# EAGLE board Mother Board (EAGLE 9.6.2)
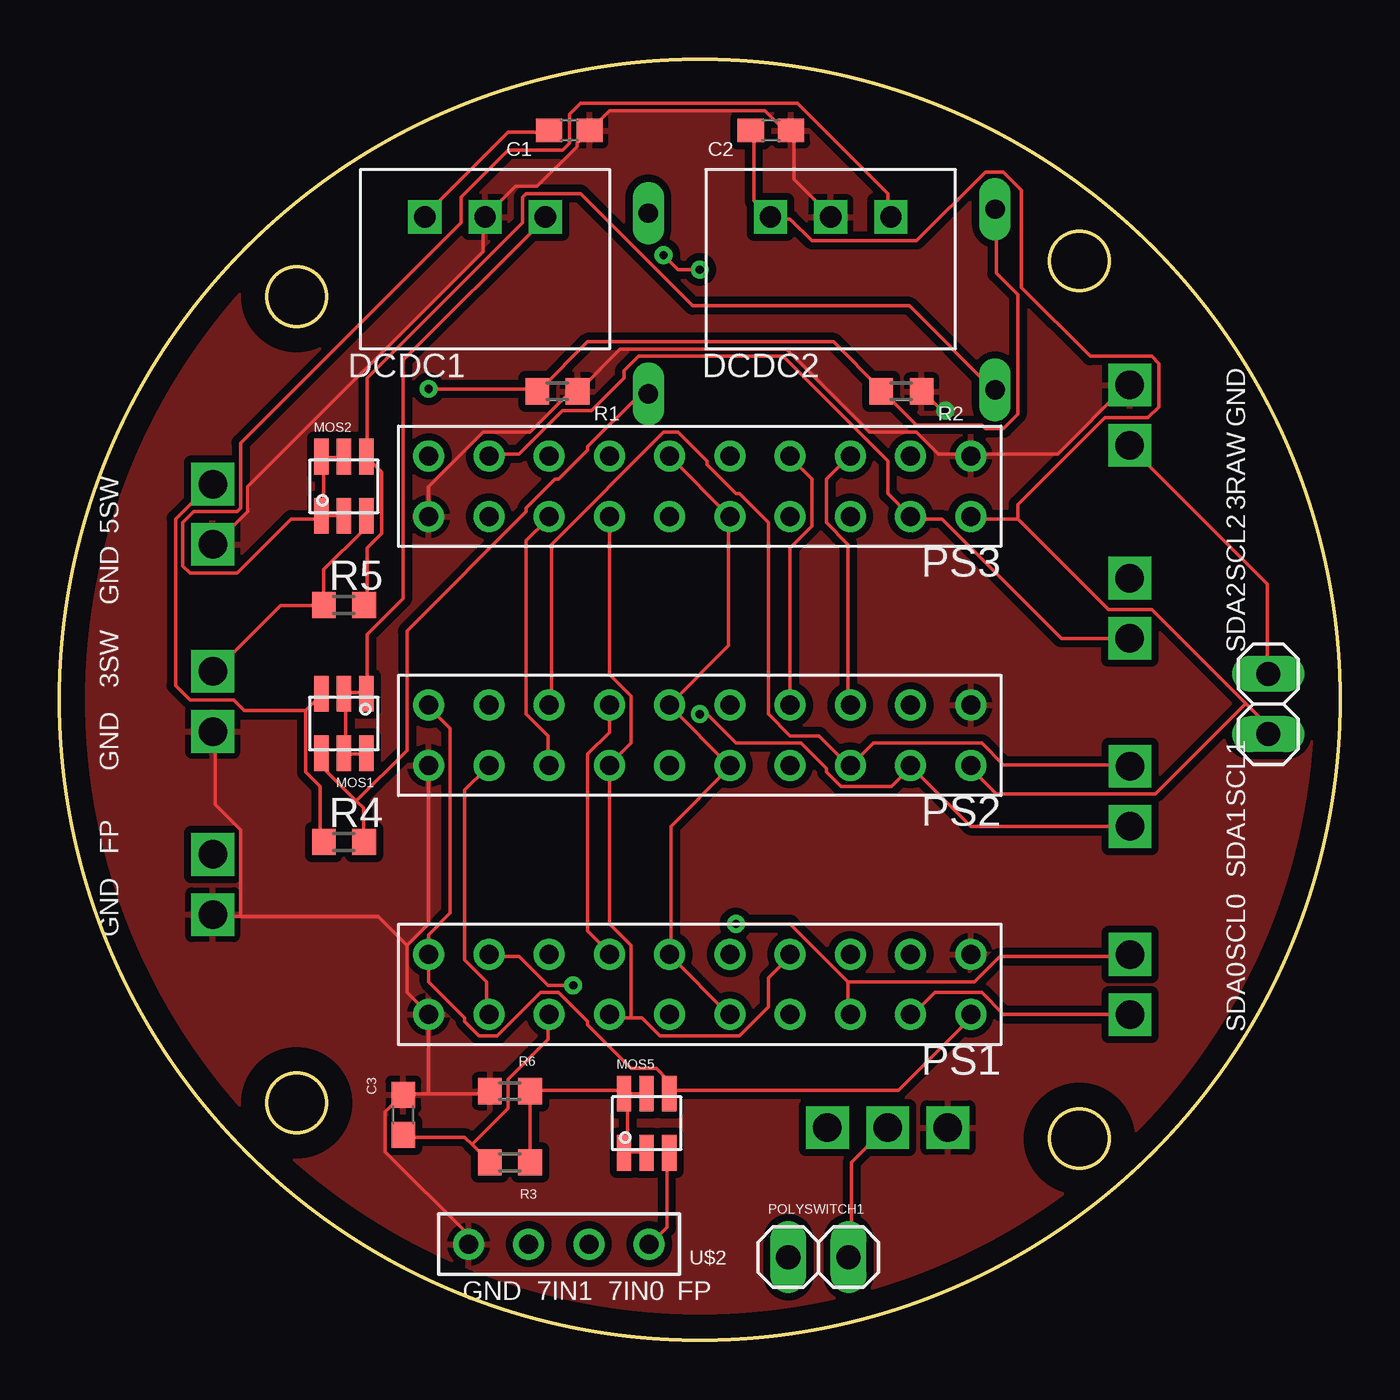
[diagram p0: board, top side]
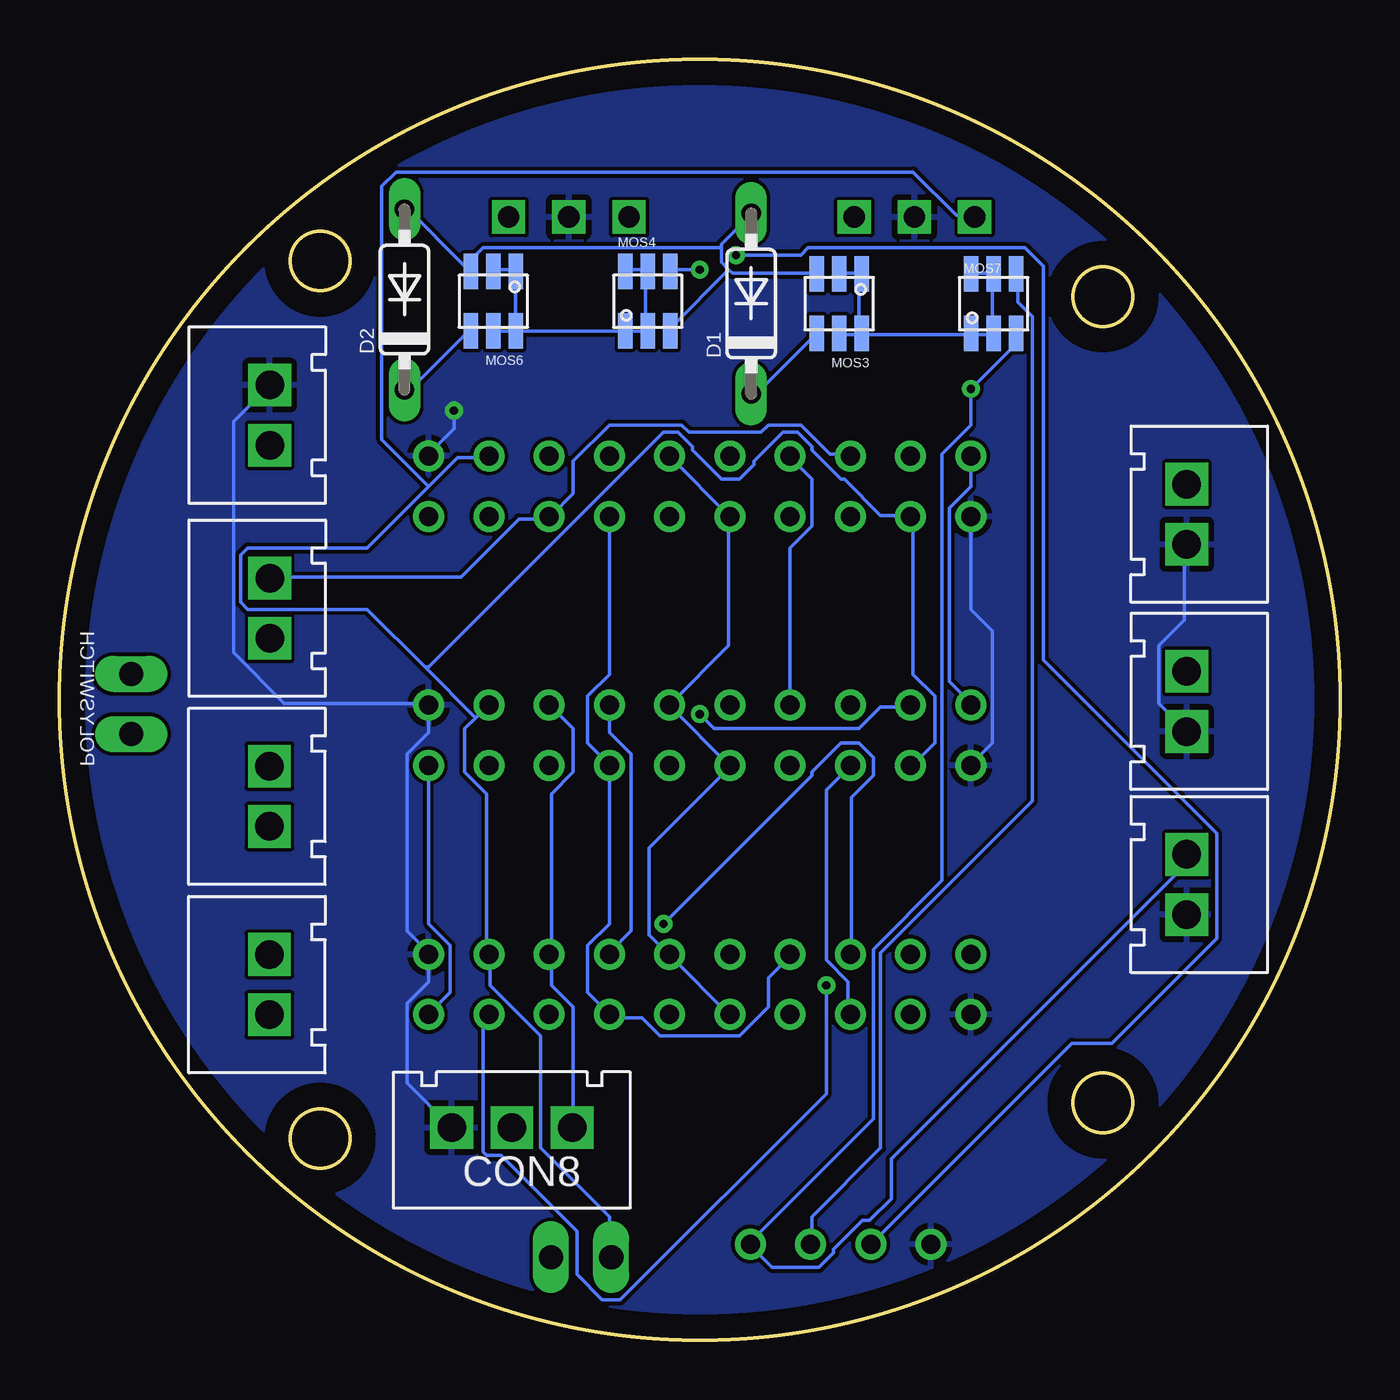
[diagram p1: board, bottom side, seen from below]

Size 54 x 54 mm. Coordinates in mm from the lower left corner, seen from the top.
Outline: circle at 27,27 radius 27
Outline: circle at 10,44 radius 1.25
Outline: circle at 10,10 radius 1.25
Outline: circle at 43,45.5 radius 1.25
Outline: circle at 43,8.5 radius 1.25
Copper layers (1*16): Top 0.035mm / dielectric 1.5mm / Bottom 0.035mm
Design rules "default": minimum track width 6mil, minimum drill 0.35mm, track to track 6mil, track to pad 6mil, pad to pad 6mil, via to via 6mil, smd to smd 6mil, copper to edge 40mil, drill to drill 6mil, minimum pad ring 10mil, minimum via ring 8mil, stop-mask expansion 4mil, vias tented up to drill 0mil, thermal gap 10mil
Net classes: 1 esp: width 0.254 mm, drill 0.127 mm, clearance 0.025 mm

## Footprints (pad centres in the part's own frame; a part is rotated, then mirrored left to right if it is on the bottom)
C0603 = smd 1.1 x 1: 1 -0.85,0; 2 0.85,0
2PIN = drill 1.2 square: P$1 -1.27,0; P$2 1.27,0
3PIN = drill 1.2 square: P$1 2.54,-2.54; P$2 5.08,-2.54; P$3 7.62,-2.54
DO35-7 = drill 0.813 long: A 3.81,0; C -3.81,0
5V1A_M78AR05-1 = drill 0.9 pad 1.27 square: GND 0,0; VIN 2.54,0; VOUT -2.54,0
3.3V1A_M78AR033-1 = drill 0.9 pad 1.27 square: GND 0,0; VIN 2.54,0; VOUT -2.54,0
SSM6J808R = smd 0.6 x 1.5: 1 -0.95,-1.25; 2 0,-1.25; 3 0.95,-1.25; 4 0.95,1.25; 5 0,1.25; 6 -0.95,1.25
1X02 = drill 1.016 long: 1 -1.27,0; 2 1.27,0
2X10 = drill 0.8: P$1 0,1.27; P$2 0,-1.27; P$3 -2.54,1.27; P$4 -2.54,-1.27; P$5 -5.08,1.27; P$6 -5.08,-1.27; P$7 -7.62,1.27; P$8 -7.62,-1.27; P$9 -10.16,1.27; P$10 -10.16,-1.27; P$11 -12.7,1.27; P$12 -12.7,-1.27; P$13 -15.24,1.27; P$14 -15.24,-1.27; P$15 -17.78,1.27; P$16 -17.78,-1.27; P$17 -20.32,1.27; P$18 -20.32,-1.27; P$19 -22.86,1.27; P$20 -22.86,-1.27
R0603 = smd 1 x 1.1: 1 -0.85,0; 2 0.85,0
1X4 = drill 0.8: P$1 0,0; P$2 2.54,0; P$3 5.08,0; P$4 7.62,0

## Placement (x,y rotation side)
C1  3.3uF  [C0603]  21.5,51 0 top
C2  3.3uF  [C0603]  30,51 0 top
C3  10uF  [C0603]  14.5,9.5 90 top
CON1  [2PIN]  45.14,14.99 270 bottom
CON2  [2PIN]  45.14,22.93 270 bottom
CON3  [2PIN]  45.13,30.86 270 bottom
CON4  [2PIN]  45.13,39 270 bottom
CON5  [2PIN]  6.47,19.21 90 bottom
CON6  [2PIN]  6.47,34.82 90 bottom
CON7  [2PIN]  6.47,26.93 90 bottom
CON8  [3PIN]  40,11.5 0 bottom
D1  1N4148DO35-7  [DO35-7]  24.83,43.7 90 bottom
D2  1N4148DO35-7  [DO35-7]  39.45,43.87 90 bottom
DCDC1  [5V1A_M78AR05-1]  17.95,47.35 0 top
DCDC2  [3.3V1A_M78AR033-1]  32.52,47.35 0 top
MOS1  [SSM6J808R]  12,26 180 top
MOS2  [SSM6J808R]  12,36 0 top
MOS3  [SSM6J808R]  21.12,43.7 180 bottom
MOS4  [SSM6J808R]  29.19,43.8 0 bottom
MOS5  [SSM6J808R]  24.76,9.15 0 top
MOS6  [SSM6J808R]  35.7,43.8 180 bottom
MOS7  [SSM6J808R]  14.61,43.7 0 bottom
POLYSWITCH  [1X02]  50.97,26.82 90 top
POLYSWITCH1  [1X02]  32,3.5 0 top
PS1  [2X10]  15.57,15 180 top
PS2  [2X10]  15.57,25.5 180 top
PS3  [2X10]  15.57,36 180 top
R1  1k  [R0603]  21,40 180 top
R2  1k  [R0603]  35.5,40 180 top
R3  1k  [R0603]  19,7.5 180 top
R4  100k  [R0603]  12,21 0 top
R5  100k  [R0603]  12,31 0 top
R6  10k  [R0603]  19,10.5 0 top
U$2  1X4  [1X4]  24.87,4.05 180 top

## Library data of the parts
C1-C3 = rcl; SPICEPREFIX: C
CON1-CON8 = XR Connector
D1 D2 = diode
DCDC1 DCDC2 = DC-DC
MOS1-MOS7 = Chip MOSFET
POLYSWITCH POLYSWITCH1 = pinhead
PS1-PS3 U$2 = PinSocket
R1-R6 = rcl; SPICEPREFIX: R

## Nets
3.3_RAW: CON4.P$2 POLYSWITCH.2
3.3VSW: CON7.P$2 MOS2.3 R5.1
5V_RAW: CON8.P$2 POLYSWITCH1.2
5VSW: CON6.P$2 MOS1.3 R4.1
7.4_0ENT: MOS7.4 U$2.P$2
7.4_1ENT: MOS4.4 U$2.P$3
+3V3: C2.1 DCDC2.VOUT MOS5.4 POLYSWITCH.1 PS1.P$2 PS1.P$19 PS2.P$2 PS2.P$19 PS3.P$2 PS3.P$19
+5V: C1.1 DCDC1.VOUT POLYSWITCH1.1 PS1.P$3 PS1.P$18 PS2.P$3 PS2.P$18 PS3.P$3 PS3.P$18
+5V1: DCDC1.VIN MOS1.1 MOS1.2 MOS1.5 MOS1.6
BIT1: PS1.P$9 PS1.P$12 PS2.P$9 PS2.P$12 PS3.P$9 PS3.P$12
BIT2: PS1.P$7 PS1.P$14 PS2.P$7 PS2.P$14 PS3.P$7 PS3.P$14
FP: CON5.P$2 D1.A D2.A MOS3.3 MOS4.3 MOS5.3 MOS6.3 MOS7.3 R1.2 R2.2 U$2.P$1
FP_CHECKER: C3.1 PS1.P$5 PS2.P$5 PS3.P$5 R3.2
GND: C1.2 C2.2 C3.2 CON4.P$1 CON5.P$1 CON6.P$1 CON7.P$1 CON8.P$1 DCDC1.GND DCDC2.GND PS1.P$1 PS1.P$20 PS2.P$1 PS2.P$20 PS3.P$1 PS3.P$20 R1.1 R2.1 R6.1 U$2.P$4
LOGRX: PS1.P$8 PS1.P$13 PS2.P$8 PS2.P$13 PS3.P$8 PS3.P$13
LOGTX: PS1.P$10 PS1.P$11 PS2.P$10 PS2.P$11 PS3.P$10 PS3.P$11
N$1: D2.C MOS2.4 MOS6.4 R5.2
N$2: MOS4.1 MOS4.2 MOS4.5 MOS4.6 MOS6.1 MOS6.2 MOS6.5 MOS6.6
N$5: DCDC2.VIN MOS2.1 MOS2.2 MOS2.5 MOS2.6
N$11: D1.C MOS1.4 MOS3.4 R4.2
N$12: MOS3.1 MOS3.2 MOS3.5 MOS3.6 MOS7.1 MOS7.2 MOS7.5 MOS7.6
N$14: MOS5.1 MOS5.2 MOS5.5 MOS5.6 R3.1 R6.2
PWM: CON8.P$3 PS1.P$16 PS2.P$16 PS3.P$16
SCL0: CON1.P$1 PS1.P$6 PS1.P$15
SCL1: CON2.P$1 PS2.P$6 PS2.P$15
SCL2: CON3.P$1 PS3.P$6 PS3.P$15
SDA0: CON1.P$2 PS1.P$4 PS1.P$17
SDA1: CON2.P$2 PS2.P$4 PS2.P$17
SDA2: CON3.P$2 PS3.P$4 PS3.P$17

## Tracks (layer width: path | path; a pad name or v marks a point on that pad's centre or on a via)
3.3_RAW
  Top 0.152: POLYSWITCH.2 50.93,28.22 50.93,31.88 45.14,37.67 CON4.P$2
3.3VSW
  Top 0.152: MOS2.3 12.83,34.62 12.83,34.16 11.15,32.49 11.15,31.12 R5.1 11,30.96 9.32,30.96 6.58,28.22 CON7.P$2
5V_RAW
  Top 0.152: POLYSWITCH1.2 33.4,3.53 33.4,7.49 34.77,8.86 CON8.P$2
5VSW
  Top 0.152: 10.39,26.54 10.39,23.95 11,23.34 11,21.06 R4.1 | 10.39,26.54 11,27.15 MOS1.3 | 10.39,26.54 7.8,26.54 7.34,27 5.51,27 4.9,27.61 4.9,34.62 6.43,36.14 CON6.P$2
7.4_0ENT
  Bottom 0.152: MOS7.4 13.59,44.83 13.59,43.76 12.98,43.15 12.98,22.73 19.38,16.33 19.38,8.1 22.28,5.21 22.28,4.14 U$2.P$2
7.4_1ENT  (via drill 0.35)
  Top 0.152: v27,45.14 26.09,45.14 v25.48,45.75
  Bottom 0.152: v27,45.14 28.22,45.14 MOS4.4 | v25.48,45.75 22.73,45.75 22.43,46.05 13.28,46.05 12.52,45.29 12.52,28.68 5.21,21.36 5.21,16.94 9.63,12.52 11.3,12.52 19.68,4.14 U$2.P$3
+3V3
  Top 0.152: C2.1 29.29,50.93 29.29,48.03 29.9,47.42 DCDC2.VOUT 30.05,47.27 30.81,47.27 31.72,46.36 36.14,46.36 39.04,49.25 39.8,49.25 40.56,48.49 40.56,44.37 43.46,41.48 46.05,41.48 46.36,41.17 46.36,39.34 45.9,38.89 44.07,38.89 40.41,35.23 40.41,34.62 | 40.41,34.62 38.43,34.62 PS3.P$19 | 40.41,34.62 44.22,30.81 46.05,30.81 50.01,26.85 | 50.01,26.85 50.93,25.93 50.93,25.63 POLYSWITCH.1 | PS2.P$2 15.57,26.7 16.48,25.78 16.48,18.01 15.57,17.09 PS1.P$2 15.57,15.11 17.09,13.59 17.09,13.44 17.7,12.83 18.47,12.83 20.29,14.66 21.06,14.66 22.28,13.44 22.28,13.28 24.1,11.46 25.17,11.46 25.63,11 25.63,10.54 MOS5.4 25.78,10.54 35.38,10.54 38.43,13.59 PS1.P$19 | 50.01,26.85 46.2,23.04 39.5,23.04 38.43,24.1 PS2.P$19
  Bottom 0.152: PS3.P$2 15.57,35.99 16.48,35.08 16.48,27.76 15.57,26.85 PS2.P$2 | PS2.P$19 38.43,17.55 37.52,16.64 37.52,14.66 PS1.P$19
+5V
  Top 0.152: PS1.P$3 18.01,13.74 18.01,15.11 17.09,16.03 17.09,23.19 18.01,24.1 PS2.P$3 | C1.1 20.6,50.93 18.92,50.93 15.42,47.42 DCDC1.VOUT
  Bottom 0.152: PS2.P$3 18.01,24.26 17.09,25.17 17.09,27.15 18.01,28.07 18.01,34.62 PS3.P$3 18.16,34.77 19.38,34.77 20.9,36.3 21.06,36.3 22.28,37.52 22.28,37.67 22.88,38.28 23.5,38.28 24.71,37.06 24.71,36.91 25.32,36.3 26.09,36.3 27.3,37.52 27.3,37.67 27.91,38.28 28.52,38.28 38.43,28.37 38.58,28.37 | 36.45,26.24 35.99,26.7 PS2.P$18 | 36.45,26.24 36.91,25.78 36.91,23.95 35.99,23.04 35.99,16.33 PS1.P$18 35.84,16.18 35.84,14.96 33.71,12.83 33.71,8.1 30.81,5.21 30.81,3.53 POLYSWITCH1.1 | 38.43,35.99 41.02,33.4 46.05,33.4 46.36,33.1 46.36,31.12 46.05,30.81 41.02,30.81 38.58,28.37 | 38.43,35.99 37.21,37.21 35.99,37.21 PS3.P$18 | 36.45,26.24 38.58,28.37 | 38.43,35.99 40.41,37.97 40.41,48.64 39.8,49.25 18.01,49.25 16.18,47.42 15.42,47.42 DCDC1.VOUT
+5V1
  Top 0.152: MOS1.6 12.83,24.71 12.06,24.71 MOS1.5 12.06,24.87 12.06,27.15 MOS1.2 12.06,27.3 12.83,27.3 MOS1.1 12.98,27.3 12.98,29.74 14.5,31.27 14.5,41.33 20.45,47.27 DCDC1.VIN
BIT1
  Bottom 0.152: PS3.P$12 28.22,37.21 25.78,34.77 PS3.P$9 25.78,34.62 25.78,29.29 28.22,26.85 PS2.P$12 28.22,26.7 25.78,24.26 PS2.P$9 25.78,24.1 29.13,20.75 29.13,17.09 28.37,16.33 PS1.P$12 28.22,16.18 25.78,13.74 PS1.P$9
BIT2
  Top 0.152: PS2.P$14 30.81,33.4 31.72,34.31 31.72,36.3 30.81,37.21 PS3.P$14 | 24.1,13.59 24.56,13.59 25.32,12.83 28.68,12.83 29.9,14.05 29.9,15.27 30.81,16.18 PS1.P$14 | 24.1,13.59 23.19,13.59 PS1.P$7 | 24.1,13.59 24.1,16.64 23.19,17.55 PS2.P$7 23.19,24.26 24.1,25.17 24.1,27.15 23.19,28.07 PS3.P$7
  Bottom 0.152: PS2.P$14 30.81,25.63 29.9,24.71 29.9,17.25 30.81,16.33 PS1.P$14
FP  (via drill 0.35)
  Top 0.152: v15.57,40.11 20.14,40.11 R1.2 20.29,40.11 22.28,42.09 32.64,42.09 34.62,40.11 R2.2 34.77,39.95 36.14,38.58 38.89,38.58 39.04,38.43 39.8,38.43 40.41,39.04 40.41,44.07 39.5,44.98 39.5,47.57 D2.A | MOS5.3 25.63,7.8 25.63,4.75 25.02,4.14 U$2.P$1
  Bottom 0.152: MOS7.3 13.74,42.39 13.74,41.94 v15.57,40.11 15.57,38.58 16.79,37.36 16.79,19.38 19.68,16.48 19.68,9.32 24.87,4.14 U$2.P$1 24.87,3.99 23.95,3.07 21.97,3.07 21.36,3.68 21.36,3.84 20.14,5.05 19.84,5.05 18.92,5.97 18.92,7.64 6.58,19.99 6.58,20.45 CON5.P$2 | 36.91,45.29 39.34,47.73 D2.A | 36.91,45.29 36.75,45.14 MOS6.3 36.91,45.29 | 25.78,45.14 26.09,45.44 26.09,46.05 | 25.78,45.14 25.63,44.98 22.12,44.98 MOS3.3 | 26.09,46.05 26.09,46.2 24.87,47.42 D1.A | 25.78,45.14 28.22,42.7 MOS4.3 | 36.91,45.29 36.14,46.05 26.09,46.05
FP_CHECKER
  Top 0.152: 17.4,8.25 18.01,7.64 R3.2 | 17.4,8.25 17.09,8.56 14.5,8.56 C3.1 | 17.4,8.25 18.92,9.78 18.92,11 20.6,12.67 20.6,13.59 PS1.P$5 | PS2.P$5 20.6,24.26 20.6,25.48 19.68,26.39 19.68,33.71 20.6,34.62 PS3.P$5
  Bottom 0.152: PS1.P$5 20.75,13.74 20.75,15.11 21.67,16.03 21.67,23.19 20.75,24.1 PS2.P$5
GND  (via drill 0.35)
  Top 0.152: DCDC2.GND 32.49,47.42 30.96,48.95 30.96,50.93 C2.2 30.81,51.08 30.5,51.08 29.74,51.84 23.19,51.84 22.43,51.08 C1.2 22.28,50.93 21.82,50.47 21.82,50.32 20.14,48.64 19.23,48.64 18.01,47.42 DCDC1.GND 17.86,47.27 17.86,45.9 7.95,35.99 7.95,34.92 6.58,33.55 CON6.P$1 | v37.36,39.19 37.21,39.19 36.45,39.95 R2.1 | 38.43,37.36 42.09,37.36 44.98,40.26 CON4.P$1 | PS3.P$1 15.57,35.99 17.86,38.28 19.84,38.28 21.51,39.95 21.82,39.95 R1.1 21.97,40.11 23.65,41.78 30.66,41.78 34.16,38.28 36.14,38.28 37.06,37.36 38.43,37.36 | 15.57,10.39 18.01,10.39 R6.1 | 15.57,10.39 14.5,10.39 C3.2 14.35,10.24 13.74,9.63 13.74,7.95 17.25,4.45 17.25,4.14 U$2.P$4 | 15.57,10.39 PS1.P$1 14.66,14.66 14.66,16.64 | PS2.P$1 15.57,17.55 14.66,16.64 | 7.64,17.86 13.44,17.86 14.66,16.64 | 7.64,17.86 6.58,17.86 CON5.P$1 | 7.64,17.86 7.64,21.51 6.58,22.58 6.58,25.63 CON7.P$1 | 38.43,37.36 PS3.P$20
  Bottom 0.152: CON8.P$1 37.52,9.02 39.34,10.85 39.34,14.2 38.43,15.11 PS1.P$20 38.43,16.33 39.34,17.25 39.34,24.71 38.43,25.63 PS2.P$20 38.43,26.85 44.53,26.85 46.66,28.98 46.66,38.73 CON4.P$1 | v37.36,39.19 37.36,38.43 38.43,37.36 PS3.P$20 | CON6.P$1 6.58,33.4 6.58,30.35 7.64,29.29 7.64,26.85 6.58,25.78 CON7.P$1 | PS3.P$1 15.57,30.81 14.66,29.9 14.66,25.17 15.57,24.26 PS2.P$1
  pour Bottom: -4.5,55 58,55 58,-4 -2.5,-4 -2.5,53
  pour Top (isolate 0.305): -6.5,56.5 57.5,56.5 60.5,53.5 60.5,-4 57.5,-7 -2.5,-7 -5.5,-4 -5.5,55.5
LOGRX
  Top 0.152: PS2.P$8 23.19,25.63 22.28,24.71 22.28,17.25 23.19,16.33 PS1.P$8
  Bottom 0.152: PS2.P$8 23.19,33.4 22.28,34.31 22.28,36.3 23.19,37.21 PS3.P$8 | PS1.P$8 23.19,16.18 24.1,15.27 24.1,14.05 25.32,12.83 28.68,12.83 29.44,13.59 30.81,13.59 PS1.P$13 31.72,14.66 31.72,16.64 30.81,17.55 PS2.P$13 30.81,24.26 31.72,25.17 31.72,27.15 30.81,28.07 PS3.P$13
LOGTX
  Top 0.152: PS3.P$10 25.78,37.21 28.22,34.77 PS3.P$11 28.22,34.62 28.22,29.29 25.78,26.85 PS2.P$10 25.78,26.7 28.22,24.26 PS2.P$11 28.22,24.1 25.78,21.67 25.78,16.33 PS1.P$10 25.78,16.18 28.22,13.74 PS1.P$11
N$1
  Top 0.152: R5.2 12.98,31.12 12.98,33.4 13.59,34.01 13.59,36.6 12.98,37.21 MOS2.4 12.98,37.36 12.98,40.56 19.53,47.12 19.53,48.18 19.68,48.34 21.97,48.34 26.7,43.61 35.84,43.61 39.34,40.11 D2.C
  Bottom 0.152: MOS6.4 36.75,42.55 39.34,39.95 D2.C
N$2
  Bottom 0.152: MOS4.6 30.05,45.14 29.29,45.14 MOS4.5 29.29,44.98 29.29,42.7 MOS4.2 29.29,42.55 30.05,42.55 MOS4.1 30.2,42.55 34.62,42.55 MOS6.6 | MOS6.6 34.77,42.55 35.69,42.55 MOS6.5 | MOS6.2 35.69,45.14 34.77,45.14 MOS6.1 34.77,44.98 34.77,42.7 MOS6.6
N$5
  Top 0.152: 11.15,34.77 11.91,34.77 MOS2.2 | 11.15,37.21 11.91,37.21 MOS2.5 | 11.15,37.21 11.15,34.77 | 11.15,34.77 MOS2.1 11,34.62 9.78,34.62 7.49,32.33 5.51,32.33 5.21,32.64 5.21,34.47 5.66,34.92 7.49,34.92 7.64,35.08 7.64,37.82 16.94,47.12 16.94,48.18 18.92,50.16 21.21,50.16 21.51,50.47 21.51,51.69 21.97,52.15 31.12,52.15 34.92,48.34 34.92,47.42 DCDC2.VIN | 11.15,37.21 MOS2.6
N$11
  Top 0.152: 12.52,22.73 11.15,24.1 11.15,24.71 MOS1.4 | 12.52,22.73 12.83,22.43 12.83,21.06 R4.2 | 12.52,22.73 14.66,24.87 14.66,29.9 19.68,34.92 19.68,35.08 20.9,36.3 21.06,36.3 22.28,37.52 22.28,37.67 24.41,39.8 24.71,39.8 D1.C
  Bottom 0.152: MOS3.4 22.12,42.39 24.71,39.8 D1.C
N$12
  Bottom 0.152: MOS7.6 15.42,44.98 14.66,44.98 MOS7.5 14.66,44.83 14.66,42.55 MOS7.2 14.66,42.39 15.42,42.39 MOS7.1 15.57,42.39 20.14,42.39 MOS3.6 | MOS3.6 20.29,42.39 21.06,42.39 MOS3.5 | MOS3.2 21.06,44.98 20.29,44.98 MOS3.1 20.29,44.83 20.29,42.55 MOS3.6
N$14
  Top 0.152: R3.1 19.84,7.64 19.84,10.39 R6.2 19.99,10.54 23.8,10.54 MOS5.6 23.95,10.39 | 23.95,7.95 24.71,7.95 MOS5.2 | 23.95,10.39 24.71,10.39 MOS5.5 | 23.95,10.39 23.95,7.95 | 23.95,7.95 MOS5.1
PWM
  Top 0.152: PS2.P$16 33.25,26.85 33.25,33.55 32.33,34.47 32.33,36.3 33.25,37.21 PS3.P$16
  Bottom 0.152: CON8.P$3 32.33,9.02 32.33,14.05 33.25,14.96 33.25,16.18 PS1.P$16 33.25,16.33 33.25,23.04 32.33,23.95 32.33,25.78 33.25,26.7 PS2.P$16
SCL0  (via drill 0.35)
  Top 0.152: v28.52,17.55 30.81,17.55 33.25,15.11 | 33.25,15.11 33.25,13.74 PS1.P$15 | 33.25,15.11 38.58,15.11 39.65,16.18 45.14,16.18 CON1.P$1
  Bottom 0.152: v28.52,17.55 22.28,23.8 22.28,23.95 21.06,25.17 20.29,25.17 19.68,24.56 19.68,23.8 20.6,22.88 20.6,16.33 PS1.P$6
SCL1
  Top 0.152: PS2.P$6 20.75,26.85 20.75,33.55 25.48,38.28 26.09,38.28 27.3,37.06 27.3,36.91 28.52,35.69 28.68,35.69 29.9,34.47 29.9,26.39 30.81,25.48 32.03,25.48 33.25,24.26 PS2.P$15 33.4,24.26 34.31,25.17 38.89,25.17 39.8,24.26 45.14,24.26 CON2.P$1
SCL2
  Bottom 0.152: CON3.P$1 44.98,32.18 37.06,32.18 34.62,34.62 33.4,34.62 PS3.P$15 33.25,34.77 32.33,35.69 32.33,37.06 30.81,38.58 27.76,38.58 27.46,38.28 24.41,38.28 24.1,38.58 22.73,38.58 21.51,37.36 20.75,37.36 PS3.P$6
SDA0  (via drill 0.35)
  Top 0.152: v21.67,14.96 20.6,14.96 19.38,16.18 18.16,16.18 PS1.P$4 | CON1.P$2 45.14,13.74 39.8,13.74 38.89,14.66 36.91,14.66 35.99,13.74 PS1.P$17
  Bottom 0.152: v21.67,14.96 21.67,10.39 30.35,1.7 31.12,1.7 32.18,2.77 32.18,4.6 35.38,7.8 35.99,7.8 36.14,7.95 36.14,13.44 35.99,13.59 PS1.P$17
SDA1  (via drill 0.35)
  Top 0.152: v27,26.39 27.3,26.39 28.52,25.17 31.27,25.17 32.33,24.1 32.33,23.95 32.94,23.34 35.08,23.34 35.84,24.1 PS2.P$17 35.99,24.1 38.43,21.67 CON2.P$2
  Bottom 0.152: v27,26.39 26.39,25.78 20.29,25.78 19.38,26.7 18.16,26.7 PS2.P$4
SDA2
  Top 0.152: CON3.P$2 44.98,29.59 42.24,29.59 37.21,34.62 35.99,34.62 PS3.P$17 35.84,34.77 34.92,35.69 34.92,37.06 30.5,41.48 24.41,41.48 23.8,40.87 23.8,40.56 22.43,39.19 21.21,39.19 19.38,37.36 18.16,37.36 PS3.P$4

## Text on the board
tPlace: GND | 3RAW | 5SW | SCL2 | GND | SDA2 | 3SW | GND | SCL1 | FP | SDA1 | GND | SCL0 | SDA0 | GND | 7IN1 | 7IN0 | FP